# Altium PCB pcb.PcbDoc (part 2 of 9)
Units mil, origin at the board's own origin, x right, y up, seen from the top; angles counter-clockwise.
Board outline 3937.01 x 3937.01 mil, 4 copper layers (Top Layer, Ground plane, Power plane, Bottom Layer), stack 51.4 mil thick; 310 components, 276 nets, 1704 pads, 977 vias.
Unrouted connection lines stored in the file: 44.
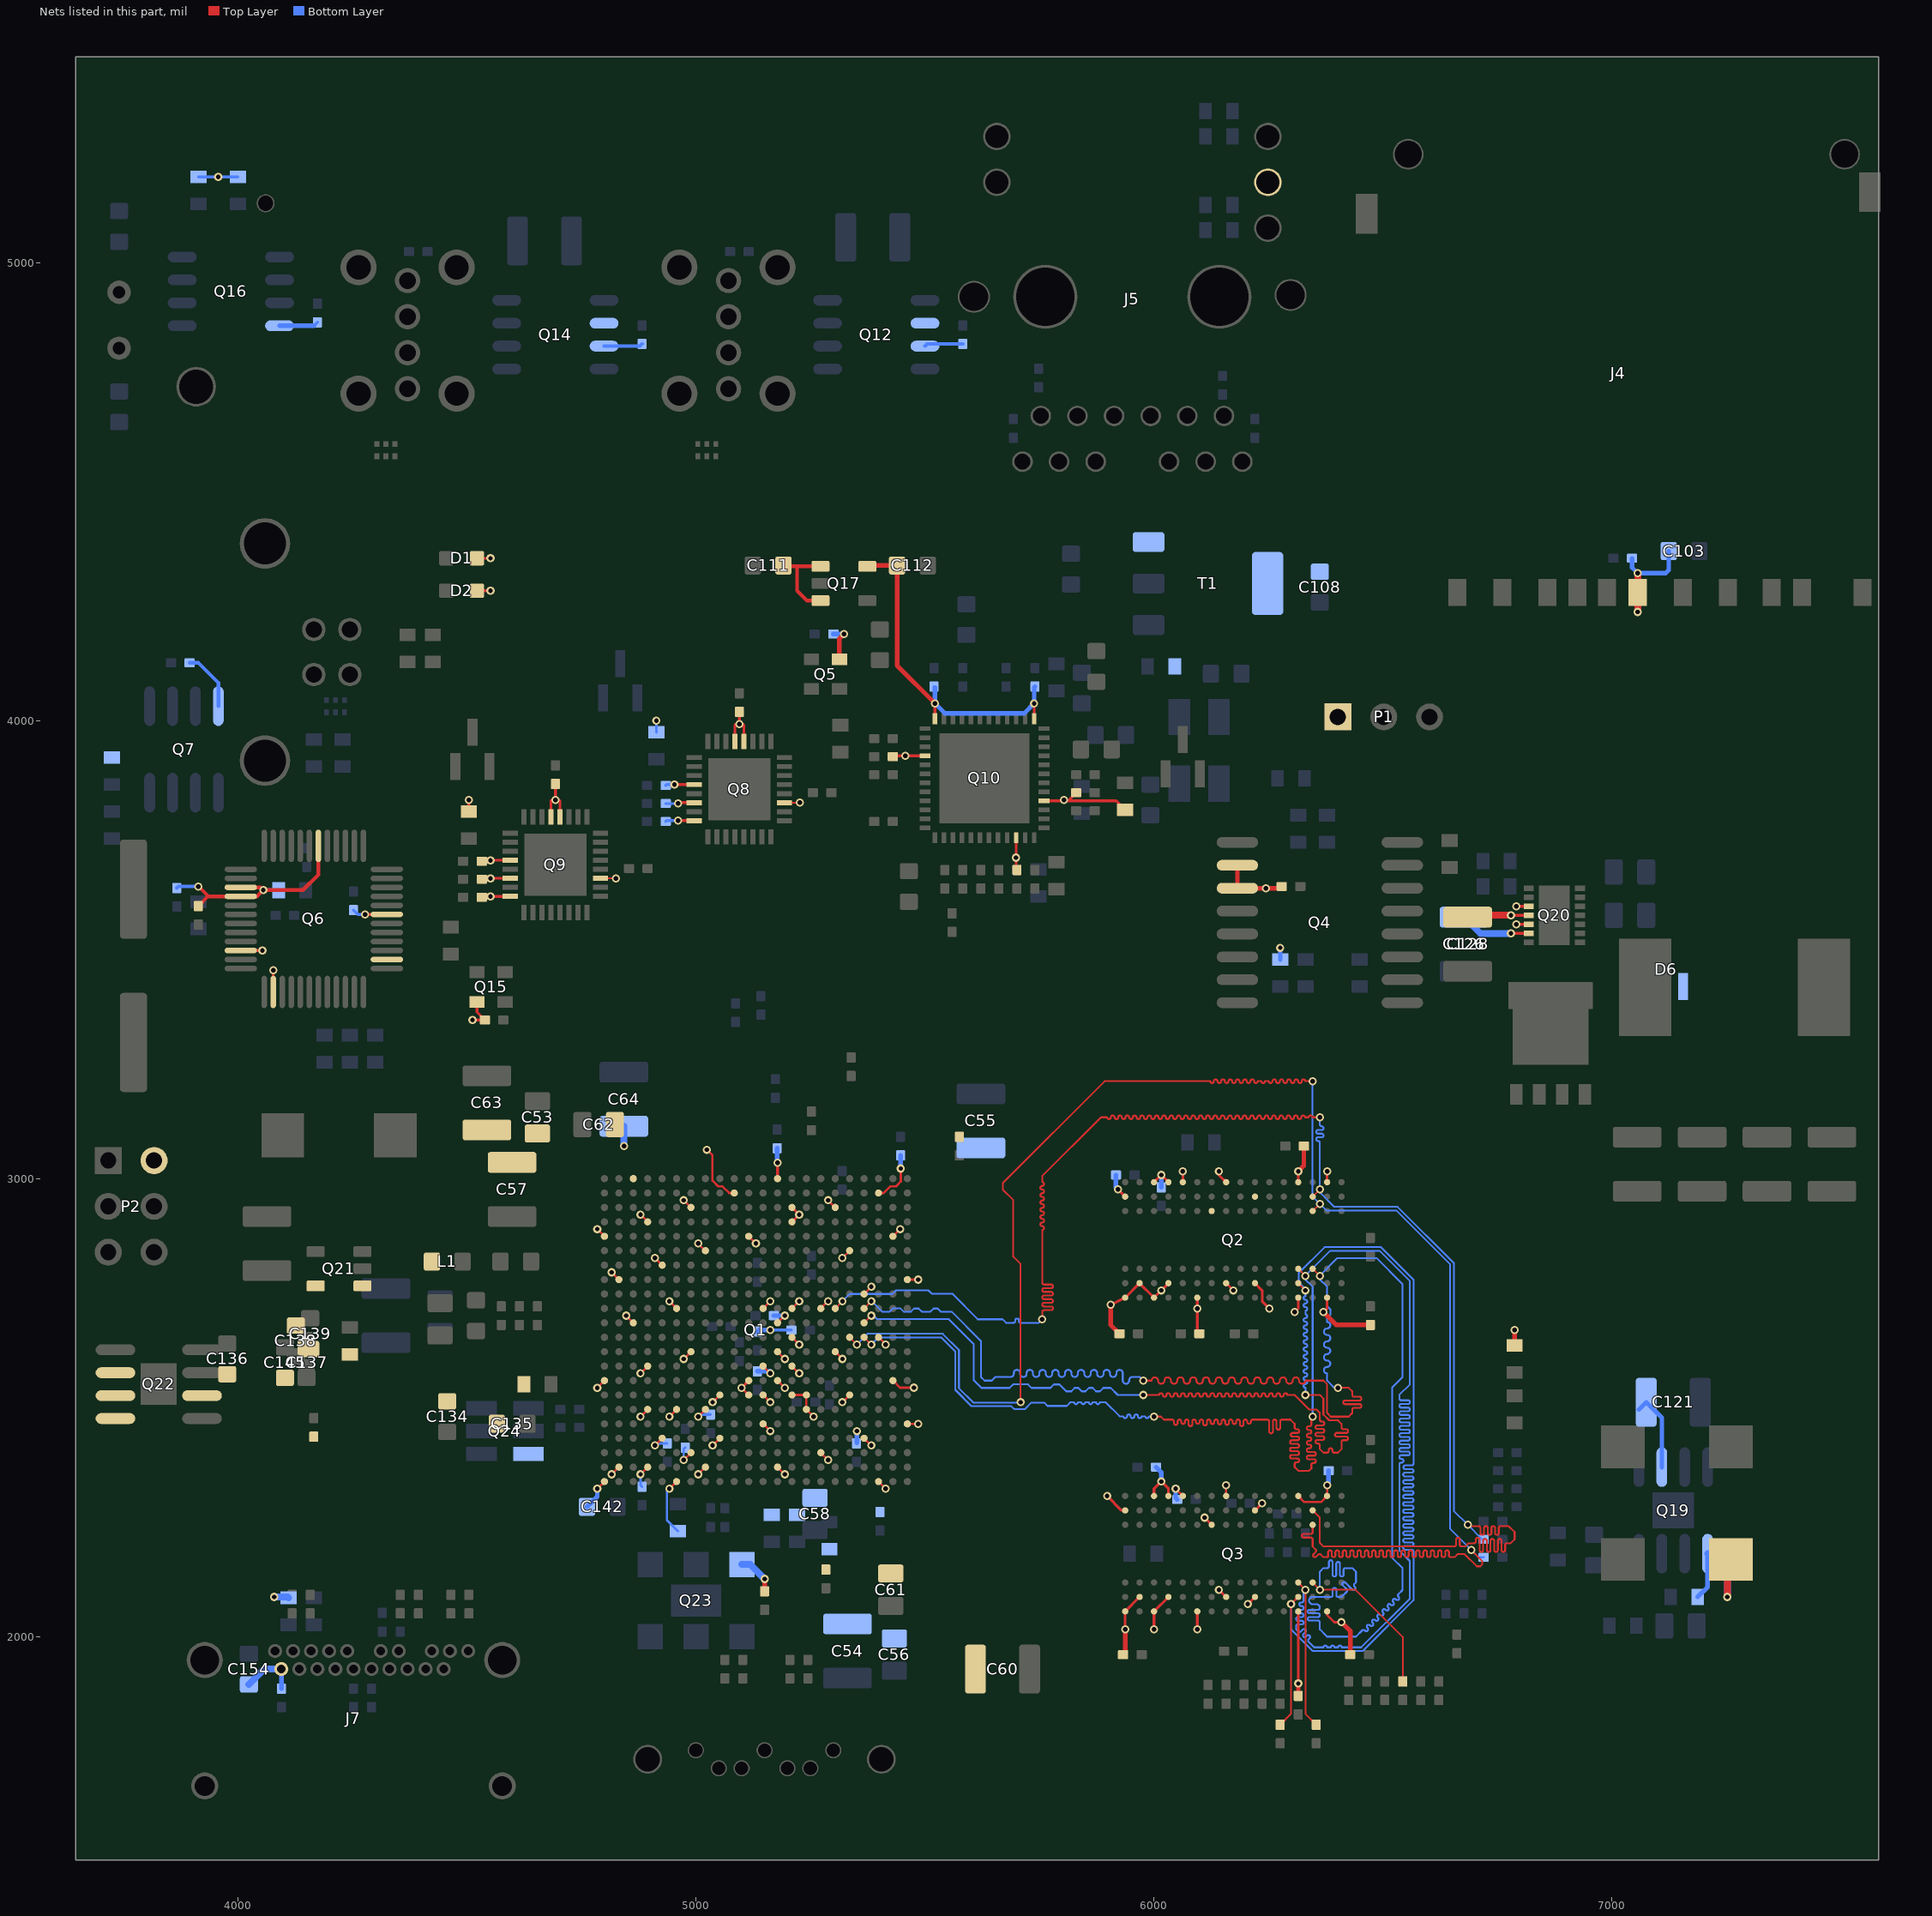
[diagram p3: the nets of this part, all layers, seen from the top]

## Via types
v1: diameter 18, hole 10, Top Layer to Bottom Layer, 932 vias
v2: diameter 19.68, hole 9.84, Top Layer to Bottom Layer, tented both sides, 18 vias
v3: diameter 19.68, hole 9.84, Top Layer to Bottom Layer, 16 vias
v4: diameter 19.68, hole 7.87, Top Layer to Bottom Layer, 11 vias

## Nets (pads, with @x,y where several pads share a name; then routed paths per layer and width w, separated by ;. In a path a pad name is that pad's centre, name@x,y a point inside that pad or via, vN(x,y) a via of type N, cw(c..) or ccw(c..) an arc to the next point about the centre after c; other vN are vias at no path point) (continued)
1V5: C1.2 C2.2 C3.2 C4.2 C5.2 C6.2 C11.2 C12.2 C13.2 C14.2 C15.2 C16.2 C40.2 C41.2 C42.2 C43.2 C60.2 C61.2 C119.1 Q1.E21 Q1.F18 Q1.H22 Q1.J19 Q1.K16 Q1.M20 Q1.N17 Q1.R21 Q1.V22 Q2.A1 Q2.A8 Q2.B2 Q2.C1 Q2.C9 Q2.D2 Q2.D9 Q2.E9 Q2.F1 Q2.G7 Q2.H2 Q2.H9 Q2.K2 Q2.K8 Q2.N1 Q2.N9 Q2.R1 Q2.R9 Q3.A1 Q3.A8 Q3.B2 Q3.C1 Q3.C9 Q3.D2 Q3.D9 Q3.E9 Q3.F1 Q3.G7 Q3.H2 Q3.H9 Q3.K2 Q3.K8 Q3.N1 Q3.N9 Q3.R1 Q3.R9 Q19.1 R2.1 R5.1 R84.2 | length 2580.7
  Top Layer w5: Q1.K16@5272.44,2716.54 v1(5288.19,2732.28) ; Q1.N17@5303.94,2622.05 v1(5319.69,2606.3) ; v1(5319.69,2826.77) Q1.F18@5335.43,2842.52 ; Q1.J19@5366.93,2748.03 v1(5382.68,2763.78) ; Q1.M20@5398.43,2653.54 v1(5414.17,2637.79) ; Q1.R21@5429.92,2559.05 5445.67,2543.31 5445.79,2543.43 v1(5475.66,2543.43) ; Q1.E21@5429.92,2874.02 v1(5445.67,2889.76) ; Q1.V22@5461.42,2464.57 v1(5485.04,2464.57) ; Q1.H22@5461.42,2779.53 v1(5485.04,2779.53) ; v1(6047.24,2322.83) Q3.E9@6062.99,2307.09 ; C4.2@6094.49,2665.94 C4.2@6099.02,2661.42 ; Q3.H9@6157.48,2307.09 6157.48,2322.83 v1(6157.48,2330.71) ; Q2.H2@6157.48,2771.65 v1(6173.23,2755.91) ; v1(6307.09,2708.66) 6314.96,2716.54 ; v1(6314.96,1897.64) Q3.N1@6314.96,2055.12 ; Q3.N9@6314.96,2307.09 6328.35,2293.7 6364.56,2293.7 Q3.R9@6377.95,2307.09 v1(6377.95,2330.71) ; Q2.N9@6314.96,2992.13 v1(6314.96,3015.75) ; Q3.R1@6377.95,2055.12 6377.95,2047.24 6393.7,2031.5 v1(6409.45,2031.5)
  Top Layer w6: v1(5897.64,2307.09) 5929.13,2275.59 Q3.A8@5937.01,2275.59 ; v1(5905.51,2724.41) Q2.A1@5937.01,2740.16 Q2.B2@5968.5,2771.65 Q2.C1@6000,2740.16 Q2.D2@6031.5,2771.65 ; v1(5921.26,2976.38) Q2.A8@5937.01,2960.63 ; v1(5937.01,2015.75) Q3.A1@5937.01,2055.12 Q3.B2@5968.5,2086.61 ; v1(6000,2015.75) Q3.C1@6000,2055.12 Q3.D2@6031.5,2086.61 ; Q3.C9@6000,2307.09 6000,2322.83 v1(6015.75,2338.58) 6031.5,2322.83 Q3.D9@6031.5,2307.09 ; Q2.C9@6000,2992.13 v1(6015.75,3007.87) Q2.D9@6031.5,2992.13 ; Q2.E9@6062.99,2992.13 v1(6062.99,3015.75) ; v1(6094.49,2015.75) Q3.F1@6094.49,2055.12 ; C4.2@6094.49,2665.94 v1(6094.49,2716.54) Q2.F1@6094.49,2740.16 ; v1(6110.24,2259.84) Q3.G7@6125.98,2244.09 ; v1(6141.73,2102.36) Q3.H2@6157.48,2086.61 ; v1(6141.73,3015.75) 6141.73,3007.87 Q2.H9@6157.48,2992.13 ; v1(6204.72,2070.87) Q3.K2@6220.47,2086.61 ; Q3.K8@6220.47,2275.59 v1(6236.22,2291.34) ; Q2.K2@6220.47,2771.65 6236.22,2755.91 6236.22,2732.28 v1(6251.97,2716.54) ; 6314.96,2716.54 Q2.N1@6314.96,2740.16 ; v1(6370.08,2708.66) 6377.95,2716.54 Q2.R1@6377.95,2740.16 ; Q2.R9@6377.95,2992.13 v1(6377.95,3015.75)
  Top Layer w10: v1(5905.51,2724.41) 5905.51,2680.51 C5.2@5924.61,2661.42 ; C16.2@5932.48,1960.63 5937.01,1965.16 v1(5937.01,2015.75) ; C14.2@6314.96,1870.67 v1(6314.96,1897.64) ; v1(6314.96,3015.75) 6327.36,3028.15 C3.2@6327.36,3070.87 ; v1(6370.08,2708.66) 6398.23,2680.51 C2.2@6472.44,2680.51 ; v1(6409.45,2031.5) 6428.54,2012.4 C15.2@6428.54,1960.63 ; R5.1@6787.4,2635.83 v1(6787.4,2669.29) ; C119.1@7251.97,2160.63 C119.1@7259.84,2168.5
  Top Layer w15: v1(7251.97,2086.61) C119.1@7251.97,2160.63
  Bottom Layer w5: v1@5916.73,2980.91 v1(5921.26,2976.38)
  Bottom Layer w6: v1(5162.2,2669.29) R2.1@5208.07,2669.29
  Bottom Layer w10: C41.2@5133.86,2665.94 5137.2,2669.29 v1(5162.2,2669.29) ; C43.2@5351.18,2422.64 v1(5351.18,2448.82) ; v1@5916.73,2980.91 C1.2@5916.73,3007.87 ; C13.2@6004.53,2370.08 6015.75,2358.86 v1(6015.75,2338.58) ; C6.2@6015.75,2980.91 v1(6015.75,3007.87) ; v1(6047.24,2322.83) 6047.24,2302.56 C11.2@6050.59,2299.21 ; v1(6377.95,2330.71) 6381.3,2334.06 C12.2@6381.3,2362.2 ; R84.2@7187.01,2086.61 7208.86,2108.46 Q19.1@7208.86,2181.1
  Bottom Layer w15: Q19.1@7208.86,2181.1 7251.97,2137.99 v1(7251.97,2086.61)
  other v1: 6015.75,2755.91
1V8: C35.2 C36.2 C37.2 C53.2 C54.2 C55.2 C56.2 C57.2 C58.2 C65.2 C68.2 C83.2 C84.2 C85.2 C86.2 C87.2 C88.2 C91.2 C92.2 C134.2 C138.2 L1.1 Q1.A13 Q1.B10 Q1.C14 Q1.D14 Q1.E11 Q1.K12 Q1.K14 Q1.L13 Q1.M14 Q1.N13 Q1.P12 Q1.P14 Q1.R13 Q1.T12 Q8.11 Q8.28 Q8.30 Q8.32 Q9.11 Q9.28 Q9.30 Q9.32 Q10.16 Q10.34 Q10.40 Q21.1 Q22.3 R69.1 R70.1 R80.1 R90.2 | length 1369.4
  Top Layer w4: Q9.11@4791.34,3655.51 v1(4824.8,3655.51) ; Q8.11@5192.91,3820.87 v1(5226.38,3820.87)
  Top Layer w5: v1(5023.62,3062.99) 5035.97,3050.64 5035.97,2995.67 5048.76,2982.88 5057.92,2982.88 5072.3,2968.5 Q1.B10@5083.46,2968.5 ; Q1.E11@5114.96,2874.02 v1(5130.71,2858.27) ; Q1.T12@5146.46,2527.56 v1(5162.21,2511.81) ; Q1.P12@5146.46,2590.55 v1(5162.21,2574.8) ; Q1.K12@5146.46,2716.54 v1(5162.21,2732.28) ; Q1.R13@5177.95,2559.05 v1(5193.7,2543.31) ; Q1.N13@5177.95,2622.05 v1(5193.7,2606.3) ; Q1.L13@5177.95,2685.04 v1(5193.7,2700.79) ; Q1.P14@5209.45,2590.55 v1(5225.2,2574.8) ; Q1.M14@5209.45,2653.54 v1(5225.2,2637.79) ; Q1.K14@5209.45,2716.54 v1(5225.2,2732.28)
  Top Layer w6: R70.1@4503.94,3801.18 v1(4503.94,3826.77) ; C84.2@4532.09,3692.91 4534.06,3694.88 Q9.28@4594.49,3694.88 ; C87.2@4534.06,3616.14 Q9.32@4594.49,3616.14 ; C88.2@4534.06,3655.51 Q9.30@4594.49,3655.51 ; v1(4952.76,3860.24) Q8.28@4996.06,3860.24 ; v1(4960.63,3781.5) Q8.32@4996.06,3781.5 ; v1(4960.63,3818.9) 4962.6,3820.87 Q8.30@4996.06,3820.87 ; Q1.A13@5177.95,3000 v1(5177.95,3034.65) ; Q1.D14@5209.45,2905.51 v1(5225.2,2921.26) Q1.C14@5209.45,2937.01 ; C68.2@5429.72,3921.26 5431.69,3923.23 v1(5456.69,3923.23) Q10.16@5500,3923.23 ; Q10.34@5698.82,3744.09 v1(5698.82,3700.79) 5698.82,3675.79 C91.2@5700.79,3673.82 ; Q10.40@5759.84,3824.8 v1@5801.18,3824.8 ; v1(5803.15,3826.77) v1@5801.18,3824.8 ; C92.2@5830.12,3842.52 5812.4,3824.8 ; R80.1@5937.01,3805.12 5917.32,3824.8 5812.4,3824.8 ; v1@5801.18,3824.8 5812.4,3824.8
  Bottom Layer w6: R69.1@4913.39,3974.41 v1(4913.39,4000) ; C83.2@4933.66,3779.53 4935.63,3781.5 v1(4960.63,3781.5) ; C86.2@4933.66,3818.9 v1(4960.63,3818.9) ; C85.2@4933.66,3858.27 4935.63,3860.24 v1(4952.76,3860.24)
  Bottom Layer w10: C37.2@5133.86,2579.33 5162.21,2579.33 v1(5162.21,2574.8) ; C35.2@5169.88,2700.79 v1(5193.7,2700.79) ; C65.2@5177.17,3066.34 5177.17,3034.65 v1(5177.95,3034.65)
  other v1: 4551.18,3616.14 4551.18,3655.51 4551.18,3694.88
3V3: C17.2 C20.2 C26.2 C39.2 C62.2 C63.2 C64.2 C81.2 C82.2 C101.2 C102.2 C103.2 C108.2 C114.2 C139.1 C153.2 C154.2 C163.2 C166.2 D1.A D2.A J4.4 J5.16 J7.20 P1.1 P2.2 Q1.A3 Q1.AA13 Q1.AB20 Q1.B20 Q1.C7 Q1.C17 Q1.D4 Q1.E1 Q1.F8 Q1.G5 Q1.H2 Q1.K6 Q1.L3 Q1.N7 Q1.P4 Q1.R1 Q1.R11 Q1.T9 Q1.T11 Q1.T14 Q1.T15 Q1.T18 Q1.U15 Q1.V12 Q1.W19 Q1.Y16 Q4.2 Q4.3 Q5.4 Q6.10 Q6.14 Q6.26 Q6.31 Q8.20 Q8.21 Q9.20 Q9.21 Q15.4 Q16.8 Q22.2 Q22.4 Q23.6 Q24.6 R34.2 R35.2 R36.2 R42.2 R81.2 R82.2 R83.2 R94.2 T1.3 T1.4 | length 2174.4
  Top Layer w5: v1(4784.25,2543.31) Q1.R1@4800,2559.05 ; v1(4784.25,2889.76) Q1.E1@4800,2874.02 ; v1(4815.75,2795.28) Q1.H2@4831.5,2779.53 ; v1(4847.24,2700.79) Q1.L3@4862.99,2685.04 ; v1(4878.74,2574.8) Q1.P4@4894.49,2590.55 ; v1(4878.74,2921.26) Q1.D4@4894.49,2905.51 ; v1(4910.24,2826.77) Q1.G5@4925.98,2811.02 ; v1(4941.73,2732.28) Q1.K6@4957.48,2716.54 ; v1(4973.23,2606.3) Q1.N7@4988.98,2622.05 ; v1(4973.23,2952.76) Q1.C7@4988.98,2937.01 ; v1(5004.72,2858.27) Q1.F8@5020.47,2842.52 ; v1(5036.22,2511.81) Q1.T9@5051.97,2527.56 ; v1(5099.21,2543.31) Q1.T11@5114.96,2527.56 ; Q1.V12@5146.46,2464.57 v1(5162.21,2448.82) ; Q1.AA13@5177.95,2370.08 v1(5193.7,2354.33) ; Q1.T14@5209.45,2527.56 Q1.T15@5240.95,2527.56 Q1.U15@5240.95,2496.06 v1(5256.69,2480.31) ; Q1.Y16@5272.44,2401.57 v1(5288.19,2385.83) ; v1(5288.19,2952.76) Q1.C17@5303.94,2937.01 ; Q1.W19@5366.93,2433.07 v1(5382.68,2417.32) ; Q1.AB20@5398.43,2338.58 v1(5414.17,2322.83) ; Q1.B20@5398.43,2968.5 5409.59,2968.5 5423.97,2982.88 5436.42,2982.88 5447.04,2993.5 v1(5447.04,3021.85)
  Top Layer w5.12: v1(5319.69,2511.81) Q1.T18@5335.43,2527.56
  Top Layer w6: Q6.10@4005.91,3498.03 v1(4053.15,3498.03) ; Q6.14@4076.77,3407.48 v1(4076.77,3454.72) ; v1(4277.56,3576.77) Q6.31@4324.8,3576.77 ; v1(4511.81,3346.46) C101.2@4538.78,3346.46 4521.65,3363.58 Q15.4@4521.65,3385.83 ; D2.A@4521.65,4283.46 v1(4551.18,4283.46) ; D1.A@4521.65,4354.33 v1(4551.18,4354.33) ; Q9.21@4683.07,3789.37 4683.07,3824.8 4685.04,3826.77 v1(4692.91,3826.77) ; C82.2@4692.91,3861.61 v1(4692.91,3826.77) ; Q9.20@4702.76,3789.37 4702.76,3824.8 4700.79,3826.77 v1(4692.91,3826.77) ; Q8.21@5084.65,3954.72 5084.65,3990.16 5086.61,3992.13 v1(5094.49,3992.13) ; C81.2@5094.49,4019.09 v1(5094.49,3992.13) ; v1(5099.21,2543.31) Q1.R11@5114.96,2559.05 ; Q8.20@5104.33,3954.72 5104.33,3990.16 5102.36,3992.13 v1(5094.49,3992.13)
  Top Layer w10: C163.2@5149.61,2099.02 v1(5149.61,2125.98) ; Q5.4@5312.99,4133.86 5312.99,4179.13 v1(5322.83,4188.98) ; Q4.2@6182.09,3684.06 Q4.3@6182.09,3634.06 v1(6244.09,3634.06) 6275.2,3634.06 C17.2@6278.94,3637.8
  Top Layer w15: v1(7056.1,4237.2) J4.4@7056.1,4279.53 v1(7056.1,4321.85)
  Bottom Layer w6: R83.2@3913.39,5187.01 v1(3956.69,5187.01) R82.2@4000,5187.01 ; C114.2@4165.75,4862.01 C114.2@4173.23,4869.49 ; C20.2@4251.97,3586.02 4261.22,3576.77 v1(4277.56,3576.77)
  Bottom Layer w10: Q16.8@4090.55,4862.01 C114.2@4165.75,4862.01 ; C153.2@4094.49,1886.42 J7.20@4094.49,1929.13 ; C26.2@5299.8,4188.98 v1(5322.83,4188.98) ; v1@5446.85,3021.85 C39.2@5446.85,3050.59 ; R36.2@6275.59,3478.35 v1(6275.59,3503.94) ; C102.2@7043.9,4354.33 7043.9,4334.06 v1(7056.1,4321.85) 7117.13,4321.85 7124.02,4328.74 C103.2@7124.02,4370.08
  Bottom Layer w15: C154.2@4023.62,1895.67 4057.09,1929.13 J7.20@4094.49,1929.13 ; v1(4078.74,2086.61) 4108.27,2086.61 R94.2@4110.24,2084.65 ; v1(4842.52,3070.87) C64.2@4842.52,3114.17 ; Q23.6@5100,2157.48 5118.11,2157.48 v1(5149.61,2125.98)
5V: C18.2 C19.2 C25.1 C99.2 C100.2 C111.2 C121.2 C126.2 C128.2 D6.1 Q6.3 Q6.4 Q6.42 Q7.8 Q12.2 Q12.3 Q14.2 Q14.3 Q17.1 Q17.3 Q19.6 Q20.3 Q20.4 Q20.5 Q20.6 R43.2 R53.1 | length 1540.2
  Top Layer w6: v1(6779.53,3535.43) Q20.6@6817.91,3535.43 ; v1(6779.53,3574.8) Q20.4@6817.91,3574.8 ; v1(6791.34,3555.12) Q20.5@6817.91,3555.12 ; v1(6791.34,3594.49) Q20.3@6817.91,3594.49
  Top Layer w8: C19.2@3913.39,3595.08 3934.45,3616.14 3935.04,3616.14 ; v1(3913.39,3637.8) 3935.04,3616.14 ; Q6.3@4005.91,3635.83 4049.21,3635.83 v1(4055.12,3629.92) ; Q6.42@4175.2,3726.38 4175.2,3663.39 4141.73,3629.92 v1(4055.12,3629.92) ; C111.2@5190.94,4338.58 5192.91,4336.61 5220.47,4336.61 ; Q17.3@5271.65,4261.81 5242.13,4261.81 5220.47,4283.46 5220.47,4336.61 ; Q17.1@5271.65,4336.61 5220.47,4336.61 ; 3935.04,3616.14 Q6.4@4005.91,3616.14 4041.34,3616.14 v1(4055.12,3629.92)
  Top Layer w15: C128.2@6685.04,3570.87 6688.98,3574.8 v1(6779.53,3574.8)
  Bottom Layer w8: C18.2@3866.14,3634.45 3869.49,3637.8 v1(3913.39,3637.8) ; C25.1@3894.29,4125.98 3913.39,4125.98 3956.89,4082.48 Q7.8@3956.89,4031.5 ; v1(4055.12,3629.92) R43.2@4088.58,3629.92 ; Q14.3@4799.21,4817.52 4877.17,4817.52 C100.2@4881.89,4822.24 ; Q12.3@5500,4817.52 5504.72,4822.24 C99.2@5582.68,4822.24
  Bottom Layer w10: C121.2@7058.86,2495.87 C121.2@7074.8,2511.81 7108.86,2477.76 Q19.6@7108.86,2370.08
  Bottom Layer w15: C126.2@6681.1,3574.8 C126.2@6677.17,3570.87 6712.6,3535.43 v1(6779.53,3535.43)
A0: Q1.M19 Q2.N3 Q3.N3 R7.1 | length 4398.8
  Top Layer w4: Q1.M19@5366.93,2653.54 v1(5382.68,2637.79) ; v1(6000,2480.32) 6015.22,2480.32 6021.68,2473.86 6039.5,2473.86 cw(c6039.5,2469.86) 6043.5,2469.86 6043.5,2466.43 ccw(c6047.5,2466.43) 6047.5,2462.43 ccw(c6047.5,2466.43) 6051.5,2466.43 6051.5,2469.86 cw(c6055.5,2469.86) 6055.5,2473.86 cw(c6055.5,2469.86) 6059.5,2469.86 6059.5,2468.45 ccw(c6063.5,2468.45) 6063.5,2464.45 ccw(c6063.5,2468.45) 6067.5,2468.45 6067.5,2469.86 cw(c6071.5,2469.86) 6071.5,2473.86 cw(c6071.5,2469.86) 6075.5,2469.86 6075.5,2463.55 ccw(c6079.5,2463.55) 6079.5,2459.55 ccw(c6079.5,2463.55) 6083.5,2463.55 6083.5,2469.86 cw(c6087.5,2469.86) 6087.5,2473.86 cw(c6087.5,2469.86) 6091.5,2469.86 6091.5,2468.66 ccw(c6095.5,2468.66) 6095.5,2464.66 ccw(c6095.5,2468.66) 6099.5,2468.66 6099.5,2469.86 cw(c6103.5,2469.86) 6103.5,2473.86 cw(c6103.5,2469.86) 6107.5,2469.86 6107.5,2465.18 ccw(c6111.5,2465.18) 6111.5,2461.18 ccw(c6111.5,2465.18) 6115.5,2465.18 6115.5,2469.86 cw(c6119.5,2469.86) 6119.5,2473.86 cw(c6119.5,2469.86) 6123.5,2469.86 6123.5,2468.02 ccw(c6127.5,2468.02) 6127.5,2464.02 ccw(c6127.5,2468.02) 6131.5,2468.02 6131.5,2469.86 cw(c6135.5,2469.86) 6135.5,2473.86 cw(c6135.5,2469.86) 6139.5,2469.86 6139.5,2467.35 ccw(c6143.5,2467.35) 6143.5,2463.35 ccw(c6143.5,2467.35) 6147.5,2467.35 6147.5,2469.86 cw(c6151.5,2469.86) 6151.5,2473.86 cw(c6151.5,2469.86) 6155.5,2469.86 6155.5,2466.43 ccw(c6159.5,2466.43) 6159.5,2462.43 ccw(c6159.5,2466.43) 6163.5,2466.43 6163.5,2469.86 cw(c6167.5,2469.86) 6167.5,2473.86 cw(c6167.5,2469.86) 6171.5,2469.86 6171.5,2468.45 ccw(c6175.5,2468.45) 6175.5,2464.45 ccw(c6175.5,2468.45) 6179.5,2468.45 6179.5,2469.86 cw(c6183.5,2469.86) 6183.5,2473.86 cw(c6183.5,2469.86) 6187.5,2469.86 6187.5,2463.55 ccw(c6191.5,2463.55) 6191.5,2459.55 ccw(c6191.5,2463.55) 6195.5,2463.55 6195.5,2469.86 cw(c6199.5,2469.86) 6199.5,2473.86 cw(c6199.5,2469.86) 6203.5,2469.86 6203.5,2468.69 ccw(c6207.5,2468.69) 6207.5,2464.69 ccw(c6207.5,2468.69) 6211.5,2468.69 6211.5,2469.86 cw(c6215.5,2469.86) 6215.5,2473.86 6247.5,2473.86 cw(c6247.5,2469.86) 6251.5,2469.86 6251.5,2447.86 ccw(c6255.5,2447.86) 6255.5,2443.86 ccw(c6255.5,2447.86) 6259.5,2447.86 6259.5,2469.86 cw(c6263.5,2469.86) 6263.5,2473.86 cw(c6263.5,2469.86) 6267.5,2469.86 6267.5,2455.7 ccw(c6271.5,2455.7) 6271.5,2451.7 ccw(c6271.5,2455.7) 6275.5,2455.7 6275.5,2469.86 cw(c6279.5,2469.86) 6279.5,2473.86 6297.8,2473.86 6307.09,2464.57 6307.09,2456.69 ccw(c6311.09,2456.69) 6311.09,2452.69 6313.09,2452.69 cw(c6313.09,2448.69) 6317.09,2448.69 cw(c6313.09,2448.69) 6313.09,2444.69 6302.46,2444.69 ccw(c6302.46,2440.69) 6298.46,2440.69 ccw(c6302.46,2440.69) 6302.46,2436.69 6313.09,2436.69 cw(c6313.09,2432.69) 6317.09,2432.69 cw(c6313.09,2432.69) 6313.09,2428.69 6301.09,2428.69 ccw(c6301.09,2424.69) 6297.09,2424.69 ccw(c6301.09,2424.69) 6301.09,2420.69 6313.09,2420.69 cw(c6313.09,2416.69) 6317.09,2416.69 cw(c6313.09,2416.69) 6313.09,2412.69 6301.09,2412.69 ccw(c6301.09,2408.69) 6297.09,2408.69 ccw(c6301.09,2408.69) 6301.09,2404.69 6313.09,2404.69 cw(c6313.09,2400.69) 6317.09,2400.69 cw(c6313.09,2400.69) 6313.09,2396.69 6301.09,2396.69 ccw(c6301.09,2392.69) 6297.09,2392.69 ccw(c6301.09,2392.69) 6301.09,2388.69 6313.09,2388.69 cw(c6313.09,2384.69) 6317.09,2384.69 cw(c6313.09,2384.69) 6313.09,2380.69 6311.09,2380.69 ccw(c6311.09,2376.69) 6307.09,2376.69 6307.09,2369.45 6307.72,2369.45 6314.96,2362.2 6338.58,2362.2 6343.52,2367.15 6343.52,2375.15 cw(c6347.52,2375.15) 6347.52,2379.15 6349.52,2379.15 ccw(c6349.52,2383.15) 6353.52,2383.15 ccw(c6349.52,2383.15) 6349.52,2387.15 6337.52,2387.15 cw(c6337.52,2391.15) 6333.52,2391.15 cw(c6337.52,2391.15) 6337.52,2395.15 6349.52,2395.15 ccw(c6349.52,2399.15) 6353.52,2399.15 ccw(c6349.52,2399.15) 6349.52,2403.15 6337.52,2403.15 cw(c6337.52,2407.15) 6333.52,2407.15 cw(c6337.52,2407.15) 6337.52,2411.15 6339.52,2411.15 ccw(c6339.52,2415.15) 6343.52,2415.15 ccw(c6339.52,2415.15) 6339.52,2419.15 6337.52,2419.15 cw(c6337.52,2423.15) 6333.52,2423.15 cw(c6337.52,2423.15) 6337.52,2427.15 6339.52,2427.15 ccw(c6339.52,2431.15) 6343.52,2431.15 ccw(c6339.52,2431.15) 6339.52,2435.15 6337.52,2435.15 cw(c6337.52,2439.15) 6333.52,2439.15 cw(c6337.52,2439.15) 6337.52,2443.15 6339.52,2443.15 ccw(c6339.52,2447.15) 6343.52,2447.15 ccw(c6339.52,2447.15) 6339.52,2451.15 6337.52,2451.15 cw(c6337.52,2455.15) 6333.52,2455.15 cw(c6337.52,2455.15) 6337.52,2459.15 6339.52,2459.15 ccw(c6339.52,2463.15) 6343.52,2463.15 6343.52,2477.38 v1(6346.46,2480.32) ; Q3.N3@6314.96,2118.11 v1(6330.71,2102.36) 6330.71,1913.39 6330.8,1913.29 6330.8,1831.2 R7.1@6354.33,1807.68 ; Q2.N3@6314.96,2803.15 v1(6330.71,2787.4)
  Bottom Layer w4: v1(5382.68,2637.79) 5398.05,2653.17 5535.36,2653.17 5566.05,2622.47 5566.05,2538.76 5601.75,2503.06 5688.33,2503.06 5694.58,2496.8 5717.91,2496.8 5732.16,2511.06 5760.06,2511.06 5767.44,2503.68 5809.78,2503.68 5817.65,2511.56 5825.65,2511.56 ccw(c5829.65,2511.56) 5833.65,2511.56 5841.65,2511.56 ccw(c5845.65,2511.56) 5849.65,2511.56 5857.65,2511.56 ccw(c5861.65,2511.56) 5865.65,2511.56 5873.65,2511.56 ccw(c5877.65,2511.56) 5881.65,2511.56 5894.49,2511.56 5924.98,2481.06 5932.98,2481.06 ccw(c5936.98,2481.06) 5940.98,2481.06 cw(c5944.98,2481.06) 5948.98,2481.06 ccw(c5952.98,2481.06) 5956.98,2481.06 cw(c5960.98,2481.06) 5964.98,2481.06 ccw(c5968.98,2481.06) 5972.98,2481.06 5980.98,2481.06 ccw(c5984.98,2481.06) 5988.98,2481.06 5999.25,2481.06 v1(6000,2480.32) ; v1(6330.71,2102.36) 6326.73,2098.38 6326.73,2078.61 cw(c6322.73,2078.61) 6322.73,2074.61 6321.4,2074.61 ccw(c6321.4,2070.61) 6317.4,2070.61 ccw(c6321.4,2070.61) 6321.4,2066.61 6322.73,2066.61 cw(c6322.73,2062.61) 6326.73,2062.61 cw(c6322.73,2062.61) 6322.73,2058.61 6314.4,2058.61 ccw(c6314.4,2054.61) 6310.4,2054.61 ccw(c6314.4,2054.61) 6314.4,2050.61 6322.73,2050.61 cw(c6322.73,2046.61) 6326.73,2046.61 cw(c6322.73,2046.61) 6322.73,2042.61 6314.4,2042.61 ccw(c6314.4,2038.61) 6310.4,2038.61 ccw(c6314.4,2038.61) 6314.4,2034.61 6322.73,2034.61 cw(c6322.73,2030.61) 6326.73,2030.61 cw(c6322.73,2030.61) 6322.73,2026.61 6314.4,2026.61 ccw(c6314.4,2022.61) 6310.4,2022.61 6310.4,2015.88 6314.96,2011.31 ccw(c6317.79,2014.14) 6320.62,2011.31 6324.87,2015.57 cw(c6327.7,2012.74) 6330.53,2015.57 cw(c6327.7,2012.74) 6330.53,2009.91 6326.27,2005.66 ccw(c6329.1,2002.83) 6326.27,2000 ccw(c6329.1,2002.83) 6331.93,2000 6334.08,2002.15 cw(c6336.91,1999.32) 6339.74,2002.15 cw(c6336.91,1999.32) 6339.74,1996.49 6337.59,1994.34 ccw(c6340.42,1991.51) 6337.59,1988.69 6349.77,1976.5 6370.08,1976.5 cw(c6374.08,1976.5) 6378.08,1976.5 6386.08,1976.5 cw(c6390.08,1976.5) 6394.08,1976.5 6402.08,1976.5 cw(c6406.08,1976.5) 6410.08,1976.5 6452.38,1976.5 6558.69,2082.8 6558.69,2165.35 6558.47,2165.35 6535.81,2188.02 6535.81,2188.12 ; 6345.63,2542.48 6346.46,2543.31 ; v1(6346.46,2480.32) 6346.46,2543.31 ; 6535.81,2188.23 6535.81,2375.94 cw(c6539.81,2375.94) 6539.81,2379.94 6540.83,2379.94 ccw(c6540.83,2383.94) 6544.83,2383.94 ccw(c6540.83,2383.94) 6540.83,2387.94 6539.81,2387.94 cw(c6539.81,2391.94) 6535.81,2391.94 cw(c6539.81,2391.94) 6539.81,2395.94 6554.69,2395.94 ccw(c6554.69,2399.94) 6558.69,2399.94 ccw(c6554.69,2399.94) 6554.69,2403.94 6539.81,2403.94 cw(c6539.81,2407.94) 6535.81,2407.94 cw(c6539.81,2407.94) 6539.81,2411.94 6554.69,2411.94 ccw(c6554.69,2415.94) 6558.69,2415.94 ccw(c6554.69,2415.94) 6554.69,2419.94 6539.81,2419.94 cw(c6539.81,2423.94) 6535.81,2423.94 cw(c6539.81,2423.94) 6539.81,2427.94 6554.69,2427.94 ccw(c6554.69,2431.94) 6558.69,2431.94 ccw(c6554.69,2431.94) 6554.69,2435.94 6539.81,2435.94 cw(c6539.81,2439.94) 6535.81,2439.94 cw(c6539.81,2439.94) 6539.81,2443.94 6554.69,2443.94 ccw(c6554.69,2447.94) 6558.69,2447.94 ccw(c6554.69,2447.94) 6554.69,2451.94 6539.81,2451.94 cw(c6539.81,2455.94) 6535.81,2455.94 cw(c6539.81,2455.94) 6539.81,2459.94 6554.69,2459.94 ccw(c6554.69,2463.94) 6558.69,2463.94 ccw(c6554.69,2463.94) 6554.69,2467.94 6539.81,2467.94 cw(c6539.81,2471.94) 6535.81,2471.94 cw(c6539.81,2471.94) 6539.81,2475.94 6554.69,2475.94 ccw(c6554.69,2479.94) 6558.69,2479.94 ccw(c6554.69,2479.94) 6554.69,2483.94 6539.81,2483.94 cw(c6539.81,2487.94) 6535.81,2487.94 cw(c6539.81,2487.94) 6539.81,2491.94 6554.69,2491.94 ccw(c6554.69,2495.94) 6558.69,2495.94 ccw(c6554.69,2495.94) 6554.69,2499.94 6539.81,2499.94 cw(c6539.81,2503.94) 6535.81,2503.94 cw(c6539.81,2503.94) 6539.81,2507.94 6554.69,2507.94 ccw(c6554.69,2511.94) 6558.69,2511.94 ccw(c6554.69,2511.94) 6554.69,2515.94 6539.81,2515.94 cw(c6539.81,2519.94) 6535.81,2519.94 6535.81,2527.94 6558.69,2550.81 6558.69,2776.04 6492.32,2842.4 6384.68,2842.4 6330.71,2788.43 v1(6330.71,2787.4) 6330.71,2779.53 6346.46,2763.78 6346.46,2543.31
A1: Q1.M18 Q2.P7 Q3.P7 R8.1 | length 4128
  Top Layer w4: Q1.M18@5335.43,2653.54 v1(5351.18,2637.79) ; v1(5708.67,2511.8) 5708.66,2813.43 5692.79,2829.31 5692.79,2952.88 5670.04,2975.63 5670.04,2990.47 5892.17,3212.6 6122.58,3212.6 ccw(c6126.58,3212.6) 6130.58,3212.6 cw(c6134.58,3212.6) 6138.58,3212.6 ccw(c6142.58,3212.6) 6146.58,3212.6 cw(c6150.58,3212.6) 6154.58,3212.6 ccw(c6158.58,3212.6) 6162.58,3212.6 cw(c6166.58,3212.6) 6170.58,3212.6 ccw(c6174.58,3212.6) 6178.58,3212.6 cw(c6182.58,3212.6) 6186.58,3212.6 ccw(c6190.58,3212.6) 6194.58,3212.6 cw(c6198.58,3212.6) 6202.58,3212.6 ccw(c6206.58,3212.6) 6210.58,3212.6 cw(c6214.58,3212.6) 6218.58,3212.6 ccw(c6222.58,3212.6) 6226.58,3212.6 6234.58,3212.6 ccw(c6238.58,3212.6) 6242.58,3212.6 6250.58,3212.6 ccw(c6254.58,3212.6) 6258.58,3212.6 cw(c6262.58,3212.6) 6266.58,3212.6 ccw(c6270.58,3212.6) 6274.58,3212.6 cw(c6278.58,3212.6) 6282.58,3212.6 ccw(c6286.58,3212.6) 6290.58,3212.6 cw(c6294.58,3212.6) 6298.58,3212.6 ccw(c6302.58,3212.6) 6306.58,3212.6 cw(c6310.58,3212.6) 6314.58,3212.6 ccw(c6318.58,3212.6) 6322.58,3212.6 cw(c6326.58,3212.6) 6330.58,3212.6 v1(6346.46,3212.6) ; Q3.P7@6346.46,2244.09 6346.46,2228.22 cw(c6342.46,2228.22) 6342.46,2224.22 6326.96,2224.22 ccw(c6326.96,2220.22) 6322.96,2220.22 ccw(c6326.96,2220.22) 6326.96,2216.22 6342.46,2216.22 cw(c6342.46,2212.22) 6346.46,2212.22 6346.46,2196.85 6352.98,2190.32 cw(c6350.15,2187.5) 6352.98,2184.67 6348.5,2180.18 ccw(c6351.32,2177.35) 6348.5,2174.52 ccw(c6351.32,2177.35) 6354.15,2174.52 6358.64,2179.01 cw(c6361.47,2176.18) 6364.3,2179.01 6369.95,2173.35 6377.95,2173.35 ccw(c6377.95,2175.48) 6380.08,2175.48 6380.08,2184.42 cw(c6384.08,2184.42) 6384.08,2188.42 cw(c6384.08,2184.42) 6388.08,2184.42 6388.08,2177.35 ccw(c6392.08,2177.35) 6392.08,2173.35 ccw(c6392.08,2177.35) 6396.08,2177.35 6396.08,2184.42 cw(c6400.08,2184.42) 6400.08,2188.42 cw(c6400.08,2184.42) 6404.08,2184.42 6404.08,2177.35 ccw(c6408.08,2177.35) 6408.08,2173.35 ccw(c6408.08,2177.35) 6412.08,2177.35 6412.08,2184.42 cw(c6416.08,2184.42) 6416.08,2188.42 cw(c6416.08,2184.42) 6420.08,2184.42 6420.08,2177.35 ccw(c6424.08,2177.35) 6424.08,2173.35 ccw(c6424.08,2177.35) 6428.08,2177.35 6428.08,2184.42 cw(c6432.08,2184.42) 6432.08,2188.42 cw(c6432.08,2184.42) 6436.08,2184.42 6436.08,2177.35 ccw(c6440.08,2177.35) 6440.08,2173.35 ccw(c6440.08,2177.35) 6444.08,2177.35 6444.08,2184.42 cw(c6448.08,2184.42) 6448.08,2188.42 cw(c6448.08,2184.42) 6452.08,2184.42 6452.08,2177.35 ccw(c6456.08,2177.35) 6456.08,2173.35 ccw(c6456.08,2177.35) 6460.08,2177.35 6460.08,2184.42 cw(c6464.08,2184.42) 6464.08,2188.42 cw(c6464.08,2184.42) 6468.08,2184.42 6468.08,2177.35 ccw(c6472.08,2177.35) 6472.08,2173.35 ccw(c6472.08,2177.35) 6476.08,2177.35 6476.08,2184.42 cw(c6480.08,2184.42) 6480.08,2188.42 cw(c6480.08,2184.42) 6484.08,2184.42 6484.08,2177.35 ccw(c6488.08,2177.35) 6488.08,2173.35 ccw(c6488.08,2177.35) 6492.08,2177.35 6492.08,2184.42 cw(c6496.08,2184.42) 6496.08,2188.42 cw(c6496.08,2184.42) 6500.08,2184.42 6500.08,2177.35 ccw(c6504.08,2177.35) 6504.08,2173.35 ccw(c6504.08,2177.35) 6508.08,2177.35 6508.08,2184.42 cw(c6512.08,2184.42) 6512.08,2188.42 cw(c6512.08,2184.42) 6516.08,2184.42 6516.08,2177.35 ccw(c6520.08,2177.35) 6520.08,2173.35 ccw(c6520.08,2177.35) 6524.08,2177.35 6524.08,2184.42 cw(c6528.08,2184.42) 6528.08,2188.42 cw(c6528.08,2184.42) 6532.08,2184.42 6532.08,2177.35 ccw(c6536.08,2177.35) 6536.08,2173.35 ccw(c6536.08,2177.35) 6540.08,2177.35 6540.08,2184.42 cw(c6544.08,2184.42) 6544.08,2188.42 cw(c6544.08,2184.42) 6548.08,2184.42 6548.08,2177.35 ccw(c6552.08,2177.35) 6552.08,2173.35 ccw(c6552.08,2177.35) 6556.08,2177.35 6556.08,2184.42 cw(c6560.08,2184.42) 6560.08,2188.42 cw(c6560.08,2184.42) 6564.08,2184.42 6564.08,2177.35 ccw(c6568.08,2177.35) 6568.08,2173.35 ccw(c6568.08,2177.35) 6572.08,2177.35 6572.08,2184.42 cw(c6576.08,2184.42) 6576.08,2188.42 cw(c6576.08,2184.42) 6580.08,2184.42 6580.08,2177.35 ccw(c6584.08,2177.35) 6584.08,2173.35 ccw(c6584.08,2177.35) 6588.08,2177.35 6588.08,2184.42 cw(c6592.08,2184.42) 6592.08,2188.42 cw(c6592.08,2184.42) 6596.08,2184.42 6596.08,2177.35 ccw(c6600.08,2177.35) 6600.08,2173.35 ccw(c6600.08,2177.35) 6604.08,2177.35 6604.08,2184.42 cw(c6608.08,2184.42) 6608.08,2188.42 cw(c6608.08,2184.42) 6612.08,2184.42 6612.08,2177.35 ccw(c6616.08,2177.35) 6616.08,2173.35 ccw(c6616.08,2177.35) 6620.08,2177.35 6620.08,2184.42 cw(c6624.08,2184.42) 6624.08,2188.42 cw(c6624.08,2184.42) 6628.08,2184.42 6628.08,2177.35 ccw(c6632.08,2177.35) 6632.08,2173.35 ccw(c6632.08,2177.35) 6636.08,2177.35 6636.08,2184.42 cw(c6640.08,2184.42) 6640.08,2188.42 cw(c6640.08,2184.42) 6644.08,2184.42 6644.08,2177.35 ccw(c6648.08,2177.35) 6648.08,2173.35 6656.08,2173.35 6663.08,2180.35 6677.91,2180.35 6704.72,2153.54 6712.6,2153.54 6716.54,2157.48 6716.54,2165.35 v1(6692.91,2188.98) ; Q2.P7@6346.46,2929.13 v1(6362.2,2944.88)
  Bottom Layer w4: v1(5351.18,2637.79) 5351.31,2637.79 5374.68,2661.17 5538.67,2661.17 5574.05,2625.79 5574.05,2542.36 5605.35,2511.06 5707.92,2511.06 v1(5708.67,2511.8) ; v1@6345.71,3212.6 6345.71,2961.38 v1(6362.2,2944.88) 6376.69,2930.4 6528.77,2930.4 6646.69,2812.49 6646.69,2235.2 v1(6692.91,2188.98) 6708.66,2173.23 R8.1@6719.88,2173.23
A1V0: C136.1 C137.2 C143.2 C144.2 C145.1 Q1.U4 Q1.U6 Q1.U8 Q1.W5 Q1.W9 Q22.6 R91.1 | length 168.6
  Top Layer w5: v1(4878.74,2480.31) Q1.U4@4894.49,2496.06 ; v1(4910.24,2417.32) Q1.W5@4925.98,2433.07 ; v1(4941.73,2480.31) Q1.U6@4957.48,2496.06 ; v1(5004.72,2480.31) Q1.U8@5020.47,2496.06 ; v1(5036.22,2417.32) Q1.W9@5051.97,2433.07
  Bottom Layer w6: v1(4910.24,2417.32) 4914.76,2421.85 C143.2@4937.01,2421.85 ; v1(5004.72,2480.31) 5009.25,2484.84 C144.2@5031.5,2484.84
A1V2: C135.2 C140.2 C141.2 C142.1 Q1.AA2 Q1.AA4 Q1.AA8 Q1.AB1 Q1.AB6 Q1.Y7 Q21.5 R89.2 | length 343.6
  Top Layer w5: v1(4784.25,2322.83) Q1.AB1@4800,2338.58 ; v1(4815.75,2354.33) Q1.AA2@4831.5,2370.08 ; v1(4878.74,2354.33) Q1.AA4@4894.49,2370.08 ; v1(4941.73,2322.83) Q1.AB6@4957.48,2338.58 ; v1(4973.23,2385.83) Q1.Y7@4988.98,2401.57 ; v1(5004.72,2354.33) Q1.AA8@5020.47,2370.08
  Bottom Layer w5: v1(4878.74,2354.33) 4878.74,2330.51 C141.2@4881.89,2327.36 ; v1(4941.73,2322.83) 4936.41,2317.51 4936.41,2254.53 R89.2@4960.63,2230.31 ; v1(4973.23,2385.83) 4973.23,2409.65 C140.2@4976.38,2412.8
  Bottom Layer w10: C142.1@4761.81,2283.46 4784.25,2305.91 v1(4784.25,2322.83)
A2: Q1.K19 Q2.P3 Q3.P3 R9.1 | length 4415.2
  Top Layer w4: Q1.K19@5366.93,2716.54 v1(5382.68,2732.28) ; v1(5976.38,2559.06) 5994.71,2559.06 cw(c6001.71,2559.06) 6008.71,2559.06 ccw(c6015.71,2559.06) 6022.71,2559.06 cw(c6029.71,2559.06) 6036.71,2559.06 ccw(c6043.71,2559.06) 6050.71,2559.06 cw(c6057.71,2559.06) 6064.71,2559.06 ccw(c6071.71,2559.06) 6078.71,2559.06 cw(c6085.71,2559.06) 6092.71,2559.06 ccw(c6099.71,2559.06) 6106.71,2559.06 cw(c6113.71,2559.06) 6120.71,2559.06 ccw(c6127.71,2559.06) 6134.71,2559.06 cw(c6141.71,2559.06) 6148.71,2559.06 ccw(c6155.71,2559.06) 6162.71,2559.06 cw(c6169.71,2559.06) 6176.71,2559.06 ccw(c6183.71,2559.06) 6190.71,2559.06 cw(c6197.71,2559.06) 6204.71,2559.06 ccw(c6211.71,2559.06) 6218.71,2559.06 cw(c6225.71,2559.06) 6232.71,2559.06 ccw(c6239.71,2559.06) 6246.71,2559.06 cw(c6253.71,2559.06) 6260.71,2559.06 ccw(c6267.71,2559.06) 6274.71,2559.06 cw(c6281.71,2559.06) 6288.71,2559.06 ccw(c6295.71,2559.06) 6302.71,2559.06 cw(c6309.71,2559.06) 6316.71,2559.06 ccw(c6323.71,2559.06) 6330.71,2559.06 6370.08,2559.06 6377.95,2551.18 6377.95,2488.19 6385.83,2480.32 6425.2,2480.32 6433.07,2488.19 6433.07,2496.06 cw(c6436.57,2496.06) 6436.57,2499.56 6448.98,2499.56 ccw(c6448.98,2503.56) 6452.98,2503.56 ccw(c6448.98,2503.56) 6448.98,2507.56 6417.16,2507.56 cw(c6417.16,2511.56) 6413.16,2511.56 cw(c6417.16,2511.56) 6417.16,2515.56 6448.98,2515.56 ccw(c6448.98,2519.56) 6452.98,2519.56 ccw(c6448.98,2519.56) 6448.98,2523.56 6437.07,2523.56 cw(c6437.07,2527.56) 6433.07,2527.56 6433.07,2535.43 6425.2,2543.31 v1(6401.57,2543.31) ; Q3.P3@6346.46,2118.11 v1(6362.2,2102.36) 6439.95,2102.36 6543.31,1999.01 R9.1@6543.31,1902.17 ; Q2.P3@6346.46,2803.15 v1(6362.2,2787.4)
  Bottom Layer w4: v1(5382.68,2732.28) 5383.71,2732.28 5406.45,2709.54 5422.93,2709.54 5429.92,2716.54 5446.55,2716.54 5453.54,2709.54 5469.29,2709.54 5476.03,2716.28 5486.17,2716.28 5492.91,2709.54 5511.81,2709.54 5518.55,2716.28 5527.56,2716.28 5534.3,2709.54 5558.17,2709.54 5622.05,2645.67 5622.05,2566.93 5629.92,2559.06 5645.67,2559.06 5653.42,2566.8 5686.76,2566.8 ccw(c5686.76,2573.8) 5693.76,2573.8 5693.76,2575.55 cw(c5700.76,2575.55) 5700.76,2582.55 cw(c5700.76,2575.55) 5707.76,2575.55 5707.76,2573.8 ccw(c5714.76,2573.8) 5714.76,2566.8 ccw(c5714.76,2573.8) 5721.76,2573.8 5721.76,2575.55 cw(c5728.76,2575.55) 5728.76,2582.55 cw(c5728.76,2575.55) 5735.76,2575.55 5735.76,2573.8 ccw(c5742.76,2573.8) 5742.76,2566.8 ccw(c5742.76,2573.8) 5749.76,2573.8 5749.76,2575.55 cw(c5756.76,2575.55) 5756.76,2582.55 cw(c5756.76,2575.55) 5763.76,2575.55 5763.76,2573.8 ccw(c5770.76,2573.8) 5770.76,2566.8 ccw(c5770.76,2573.8) 5777.76,2573.8 5777.76,2575.55 cw(c5784.76,2575.55) 5784.76,2582.55 cw(c5784.76,2575.55) 5791.76,2575.55 5791.76,2573.8 ccw(c5798.76,2573.8) 5798.76,2566.8 ccw(c5798.76,2573.8) 5805.76,2573.8 5805.76,2575.55 cw(c5812.76,2575.55) 5812.76,2582.55 cw(c5812.76,2575.55) 5819.76,2575.55 5819.76,2573.8 ccw(c5826.76,2573.8) 5826.76,2566.8 ccw(c5826.76,2573.8) 5833.76,2573.8 5833.76,2575.55 cw(c5840.76,2575.55) 5840.76,2582.55 cw(c5840.76,2575.55) 5847.76,2575.55 5847.76,2573.8 ccw(c5854.76,2573.8) 5854.76,2566.8 ccw(c5854.76,2573.8) 5861.76,2573.8 5861.76,2575.55 cw(c5868.76,2575.55) 5868.76,2582.55 cw(c5868.76,2575.55) 5875.76,2575.55 5875.76,2573.8 ccw(c5882.76,2573.8) 5882.76,2566.8 ccw(c5882.76,2573.8) 5889.76,2573.8 5889.76,2575.55 cw(c5896.76,2575.55) 5896.76,2582.55 cw(c5896.76,2575.55) 5903.76,2575.55 5903.76,2573.8 ccw(c5910.76,2573.8) 5910.76,2566.8 ccw(c5910.76,2573.8) 5917.76,2573.8 5917.76,2575.55 cw(c5924.76,2575.55) 5924.76,2582.55 cw(c5924.76,2575.55) 5931.76,2575.55 5931.76,2559.05 ccw(c5938.76,2559.05) 5938.76,2552.05 ccw(c5938.76,2559.05) 5945.76,2559.05 5945.76,2559.8 cw(c5952.76,2559.8) 5952.76,2566.8 5968.63,2566.8 v1(5976.38,2559.06) ; v1(6362.2,2102.36) 6362.2,2141.73 6370.08,2149.61 6377.95,2149.61 ccw(c6377.95,2153.61) 6381.95,2153.61 6381.95,2162.73 cw(c6385.95,2162.73) 6385.95,2166.73 cw(c6385.95,2162.73) 6389.95,2162.73 6389.95,2135.25 ccw(c6393.95,2135.25) 6393.95,2131.25 ccw(c6393.95,2135.25) 6397.95,2135.25 6397.95,2159.04 cw(c6401.95,2159.04) 6401.95,2163.04 cw(c6401.95,2159.04) 6405.95,2159.04 6405.95,2135.25 ccw(c6409.95,2135.25) 6409.95,2131.25 ccw(c6409.95,2135.25) 6413.95,2135.25 6413.95,2145.61 cw(c6417.95,2145.61) 6417.95,2149.61 6433.07,2149.61 6440.94,2141.73 6440.94,2118.11 6437.73,2114.9 ccw(c6440.56,2112.07) 6437.73,2109.24 6438.75,2108.23 cw(c6435.92,2105.4) 6438.75,2102.57 cw(c6435.92,2105.4) 6433.09,2102.57 6417.93,2117.73 ccw(c6415.11,2114.9) 6412.28,2117.73 ccw(c6415.11,2114.9) 6412.28,2112.07 6420.76,2103.58 cw(c6417.93,2100.76) 6420.76,2097.93 6409.45,2086.61 6401.57,2086.61 cw(c6401.57,2090.11) 6398.08,2090.11 6398.08,2102.61 ccw(c6394.08,2102.61) 6394.08,2106.61 ccw(c6394.08,2102.61) 6390.08,2102.61 6390.08,2090.61 cw(c6386.08,2090.61) 6386.08,2086.61 6346.46,2086.61 ccw(c6346.46,2078.74) 6338.58,2078.74 ccw(c6346.46,2078.74) 6346.46,2070.87 6354.33,2070.87 cw(c6354.33,2062.99) 6362.2,2062.99 6362.2,2062.87 cw(c6358.2,2062.87) 6358.2,2058.87 6339.72,2058.87 ccw(c6339.72,2054.87) 6335.72,2054.87 ccw(c6339.72,2054.87) 6339.72,2050.87 6358.2,2050.87 cw(c6358.2,2046.87) 6362.2,2046.87 cw(c6358.2,2046.87) 6358.2,2042.87 6339.72,2042.87 ccw(c6339.72,2038.87) 6335.72,2038.87 ccw(c6339.72,2038.87) 6339.72,2034.87 6358.2,2034.87 cw(c6358.2,2030.87) 6362.2,2030.87 6362.2,2015.75 6377.83,2000.13 6441.07,2000.13 6454.48,2013.53 cw(c6457.3,2010.7) 6460.13,2013.53 6460.63,2013.03 ccw(c6463.46,2015.86) 6466.29,2013.03 ccw(c6463.46,2015.86) 6466.29,2018.69 6465.79,2019.19 cw(c6468.62,2022.02) 6465.79,2024.84 cw(c6468.62,2022.02) 6471.45,2024.84 6471.94,2024.35 ccw(c6474.77,2027.17) 6477.6,2024.35 ccw(c6474.77,2027.17) 6477.6,2030 6477.1,2030.5 cw(c6479.93,2033.33) 6477.1,2036.16 cw(c6479.93,2033.33) 6482.76,2036.16 6483.26,2035.66 ccw(c6486.09,2038.49) 6488.92,2035.66 ccw(c6486.09,2038.49) 6488.92,2041.32 6488.42,2041.82 cw(c6491.25,2044.64) 6488.42,2047.47 cw(c6491.25,2044.64) 6494.07,2047.47 6494.57,2046.97 ccw(c6497.4,2049.8) 6500.23,2046.97 ccw(c6497.4,2049.8) 6500.23,2052.63 6499.73,2053.13 cw(c6502.56,2055.96) 6499.73,2058.79 cw(c6502.56,2055.96) 6505.39,2058.79 6505.89,2058.29 ccw(c6508.71,2061.12) 6511.54,2058.29 ccw(c6508.71,2061.12) 6511.54,2063.94 6511.04,2064.44 cw(c6513.87,2067.27) 6511.04,2070.1 cw(c6513.87,2067.27) 6516.7,2070.1 6517.2,2069.6 ccw(c6520.03,2072.43) 6522.86,2069.6 ccw(c6520.03,2072.43) 6522.86,2075.26 6522.36,2075.76 cw(c6525.19,2078.58) 6522.36,2081.41 cw(c6525.19,2078.58) 6528.01,2081.41 6528.51,2080.91 ccw(c6531.34,2083.74) 6534.17,2080.91 ccw(c6531.34,2083.74) 6534.17,2086.57 6533.67,2087.07 cw(c6536.5,2089.9) 6533.67,2092.73 6542.69,2101.74 6542.69,2149.61 6519.81,2172.48 6519.81,2543.43 6542.69,2566.31 6542.69,2769.41 6485.7,2826.4 6400.17,2826.4 6362.2,2788.43 v1(6362.2,2787.4) 6362.2,2779.53 6377.95,2763.78 6377.95,2722 6385.08,2714.87 6385.08,2702.45 6377.95,2695.32 6377.95,2686.8 cw(c6377.95,2679.8) 6377.95,2672.8 ccw(c6377.95,2665.8) 6377.95,2658.8 cw(c6377.95,2651.8) 6377.95,2644.8 ccw(c6377.95,2637.8) 6377.95,2630.8 cw(c6377.95,2623.8) 6377.95,2616.8 ccw(c6377.95,2609.8) 6377.95,2602.8 cw(c6377.95,2595.8) 6377.95,2588.8 ccw(c6377.95,2581.8) 6377.95,2574.8 6377.95,2559.06 6393.7,2543.31 v1(6401.57,2543.31)
A3: Q1.L19 Q2.N2 Q3.N2 R11.1 | length 4367.4
  Top Layer w4: Q1.L19@5366.93,2685.04 v1(5382.68,2700.79) ; v1(5976.38,2527.56) 6011.21,2527.56 cw(c6015.21,2527.56) 6019.21,2527.56 ccw(c6023.21,2527.56) 6027.21,2527.56 cw(c6031.21,2527.56) 6035.21,2527.56 ccw(c6039.21,2527.56) 6043.21,2527.56 cw(c6047.21,2527.56) 6051.21,2527.56 ccw(c6055.21,2527.56) 6059.21,2527.56 cw(c6063.21,2527.56) 6067.21,2527.56 ccw(c6071.21,2527.56) 6075.21,2527.56 cw(c6079.21,2527.56) 6083.21,2527.56 ccw(c6087.21,2527.56) 6091.21,2527.56 cw(c6095.21,2527.56) 6099.21,2527.56 ccw(c6103.21,2527.56) 6107.21,2527.56 cw(c6111.21,2527.56) 6115.21,2527.56 ccw(c6119.21,2527.56) 6123.21,2527.56 cw(c6127.21,2527.56) 6131.21,2527.56 ccw(c6135.21,2527.56) 6139.21,2527.56 cw(c6143.21,2527.56) 6147.21,2527.56 ccw(c6151.21,2527.56) 6155.21,2527.56 cw(c6159.21,2527.56) 6163.21,2527.56 ccw(c6167.21,2527.56) 6171.21,2527.56 cw(c6175.21,2527.56) 6179.21,2527.56 ccw(c6183.21,2527.56) 6187.21,2527.56 cw(c6191.21,2527.56) 6195.21,2527.56 ccw(c6199.21,2527.56) 6203.21,2527.56 cw(c6207.21,2527.56) 6211.21,2527.56 ccw(c6215.21,2527.56) 6219.21,2527.56 cw(c6223.21,2527.56) 6227.21,2527.56 ccw(c6231.21,2527.56) 6235.21,2527.56 cw(c6239.21,2527.56) 6243.21,2527.56 ccw(c6247.21,2527.56) 6251.21,2527.56 cw(c6255.21,2527.56) 6259.21,2527.56 ccw(c6263.21,2527.56) 6267.21,2527.56 cw(c6271.21,2527.56) 6275.21,2527.56 ccw(c6279.21,2527.56) 6283.21,2527.56 cw(c6287.21,2527.56) 6291.21,2527.56 6307.09,2527.56 6318.9,2515.75 6338.58,2496.06 6354.33,2496.06 6362.2,2488.19 6362.2,2473.45 ccw(c6366.2,2473.45) 6366.2,2469.45 6367.9,2469.45 cw(c6367.9,2465.45) 6371.9,2465.45 cw(c6367.9,2465.45) 6367.9,2461.45 6356.51,2461.45 ccw(c6356.51,2457.45) 6352.51,2457.45 ccw(c6356.51,2457.45) 6356.51,2453.45 6367.9,2453.45 cw(c6367.9,2449.45) 6371.9,2449.45 cw(c6367.9,2449.45) 6367.9,2445.45 6356.51,2445.45 ccw(c6356.51,2441.45) 6352.51,2441.45 ccw(c6356.51,2441.45) 6356.51,2437.45 6367.9,2437.45 cw(c6367.9,2433.45) 6371.9,2433.45 cw(c6367.9,2433.45) 6367.9,2429.45 6356.51,2429.45 ccw(c6356.51,2425.45) 6352.51,2425.45 ccw(c6356.51,2425.45) 6356.51,2421.45 6358.2,2421.45 cw(c6358.2,2417.45) 6362.2,2417.45 6362.2,2409.45 6370.08,2401.57 6377.57,2401.57 ccw(c6377.57,2405.57) 6381.57,2405.57 6381.57,2407.27 cw(c6385.57,2407.27) 6385.57,2411.27 cw(c6385.57,2407.27) 6389.57,2407.27 6389.57,2405.57 ccw(c6393.57,2405.57) 6393.57,2401.57 6401.57,2401.57 6409.45,2409.45 6409.45,2425.2 cw(c6412.94,2425.2) 6412.94,2428.69 6419.73,2428.69 ccw(c6419.73,2432.69) 6423.73,2432.69 ccw(c6419.73,2432.69) 6419.73,2436.69 6399.17,2436.69 cw(c6399.17,2440.69) 6395.17,2440.69 cw(c6399.17,2440.69) 6399.17,2444.69 6419.73,2444.69 ccw(c6419.73,2448.69) 6423.73,2448.69 ccw(c6419.73,2448.69) 6419.73,2452.69 6413.45,2452.69 cw(c6413.45,2456.69) 6409.45,2456.69 6409.45,2464.57 6401.7,2472.32 6382.51,2472.32 6369.95,2484.88 6369.95,2519.81 6362.2,2527.56 6330.71,2527.56 v1(6330.63,2527.48) ; R11.1@6275.59,1807.68 6299.12,1831.2 6299.12,1905.42 6299.21,1905.51 v1(6299.21,2070.87) Q3.N2@6314.96,2086.61 ; Q2.N2@6314.96,2771.65 v1(6330.71,2755.91)
  Bottom Layer w4: v1(5382.68,2700.79) 5387.89,2700.79 5395.39,2693.28 5551.81,2693.28 5606.05,2639.04 5606.05,2560.3 5623.29,2543.06 5684.76,2543.06 5692.51,2550.8 5724.82,2550.8 5732.57,2543.06 5773.81,2543.06 5781.19,2550.43 5793.61,2550.43 5808.49,2535.56 5819.28,2535.56 5826.77,2543.06 5834.9,2543.06 5842.39,2535.56 5850.39,2535.56 5857.89,2543.06 5866.14,2543.06 5873.64,2535.56 5881.89,2535.56 5889.39,2543.06 5905.26,2543.06 5920.76,2527.56 v1(5976.38,2527.56) ; v1(6299.21,2070.87) 6299.21,2015.75 6346.46,1968.5 6455.7,1968.5 6566.69,2079.49 6566.69,2185.83 ccw(c6562.69,2185.83) 6562.69,2189.83 6548.08,2189.83 cw(c6548.08,2193.83) 6544.08,2193.83 cw(c6548.08,2193.83) 6548.08,2197.83 6562.69,2197.83 ccw(c6562.69,2201.83) 6566.69,2201.83 ccw(c6562.69,2201.83) 6562.69,2205.83 6548.08,2205.83 cw(c6548.08,2209.83) 6544.08,2209.83 cw(c6548.08,2209.83) 6548.08,2213.83 6562.69,2213.83 ccw(c6562.69,2217.83) 6566.69,2217.83 ccw(c6562.69,2217.83) 6562.69,2221.83 6548.08,2221.83 cw(c6548.08,2225.83) 6544.08,2225.83 cw(c6548.08,2225.83) 6548.08,2229.83 6562.69,2229.83 ccw(c6562.69,2233.83) 6566.69,2233.83 ccw(c6562.69,2233.83) 6562.69,2237.83 6548.08,2237.83 cw(c6548.08,2241.83) 6544.08,2241.83 cw(c6548.08,2241.83) 6548.08,2245.83 6562.69,2245.83 ccw(c6562.69,2249.83) 6566.69,2249.83 ccw(c6562.69,2249.83) 6562.69,2253.83 6548.08,2253.83 cw(c6548.08,2257.83) 6544.08,2257.83 cw(c6548.08,2257.83) 6548.08,2261.83 6562.69,2261.83 ccw(c6562.69,2265.83) 6566.69,2265.83 ccw(c6562.69,2265.83) 6562.69,2269.83 6548.08,2269.83 cw(c6548.08,2273.83) 6544.08,2273.83 cw(c6548.08,2273.83) 6548.08,2277.83 6562.69,2277.83 ccw(c6562.69,2281.83) 6566.69,2281.83 ccw(c6562.69,2281.83) 6562.69,2285.83 6548.08,2285.83 cw(c6548.08,2289.83) 6544.08,2289.83 cw(c6548.08,2289.83) 6548.08,2293.83 6562.69,2293.83 ccw(c6562.69,2297.83) 6566.69,2297.83 ccw(c6562.69,2297.83) 6562.69,2301.83 6548.08,2301.83 cw(c6548.08,2305.83) 6544.08,2305.83 cw(c6548.08,2305.83) 6548.08,2309.83 6562.69,2309.83 ccw(c6562.69,2313.83) 6566.69,2313.83 ccw(c6562.69,2313.83) 6562.69,2317.83 6548.08,2317.83 cw(c6548.08,2321.83) 6544.08,2321.83 cw(c6548.08,2321.83) 6548.08,2325.83 6562.69,2325.83 ccw(c6562.69,2329.83) 6566.69,2329.83 ccw(c6562.69,2329.83) 6562.69,2333.83 6548.08,2333.83 cw(c6548.08,2337.83) 6544.08,2337.83 cw(c6548.08,2337.83) 6548.08,2341.83 6562.69,2341.83 ccw(c6562.69,2345.83) 6566.69,2345.83 ccw(c6562.69,2345.83) 6562.69,2349.83 6548.08,2349.83 cw(c6548.08,2353.83) 6544.08,2353.83 cw(c6548.08,2353.83) 6548.08,2357.83 6562.69,2357.83 ccw(c6562.69,2361.83) 6566.69,2361.83 ccw(c6562.69,2361.83) 6562.69,2365.83 6548.64,2365.83 cw(c6548.64,2369.83) 6544.64,2369.83 cw(c6548.64,2369.83) 6548.64,2373.83 6562.69,2373.83 ccw(c6562.69,2377.83) 6566.69,2377.83 6566.69,2779.35 6495.64,2850.4 6372.5,2850.4 6315.71,2793.61 6315.71,2774.35 6330.71,2759.35 v1(6330.71,2755.91) ; v1(6330.63,2527.48) 6330.63,2543.48 cw(c6330.63,2547.48) 6330.63,2551.48 ccw(c6330.63,2555.48) 6330.63,2559.48 cw(c6330.63,2563.48) 6330.63,2567.48 ccw(c6330.63,2571.48) 6330.63,2575.48 cw(c6330.63,2579.48) 6330.63,2583.48 ccw(c6330.63,2587.48) 6330.63,2591.48 cw(c6330.63,2595.48) 6330.63,2599.48 ccw(c6330.63,2603.48) 6330.63,2607.48 cw(c6330.63,2611.48) 6330.63,2615.48 ccw(c6330.63,2619.48) 6330.63,2623.48 cw(c6330.63,2627.48) 6330.63,2631.48 ccw(c6330.63,2635.48) 6330.63,2639.48 cw(c6330.63,2643.48) 6330.63,2647.48 ccw(c6330.63,2651.48) 6330.63,2655.48 cw(c6330.63,2659.48) 6330.63,2663.48 ccw(c6330.63,2667.48) 6330.63,2671.48 cw(c6330.63,2675.48) 6330.63,2679.48 ccw(c6330.63,2683.48) 6330.63,2687.48 cw(c6330.63,2691.48) 6330.63,2695.48 ccw(c6330.63,2699.48) 6330.63,2703.48 6330.63,2711.48 ccw(c6330.63,2715.48) 6330.63,2719.48 cw(c6330.63,2723.48) 6330.63,2727.48 ccw(c6330.63,2731.48) 6330.63,2735.48 cw(c6330.63,2739.48) 6330.63,2743.48 v1@6330.63,2755.83
A3V3: C93.2 C94.2 C112.2 Q10.1 Q10.12 Q17.5 | length 777.9
  Top Layer w6: Q10.12@5521.65,4003.94 v1(5521.65,4037.4) ; Q10.1@5738.19,4003.94 v1(5738.19,4037.4)
  Top Layer w10: Q17.5@5374.02,4336.61 5375.98,4338.58 C112.2@5438.98,4338.58 5438.98,4120.08 v1(5521.65,4037.4)
  Bottom Layer w6: C94.2@5519.69,4074.21 C94.2@5521.65,4072.24
  Bottom Layer w10: C94.2@5521.65,4072.24 v1(5521.65,4037.4) 5543.31,4015.75 5716.54,4015.75 v1(5738.19,4037.4) 5738.19,4072.24 C93.2@5740.16,4074.21
A4: Q1.K17 Q2.P8 Q3.P8 R13.1 | length 4142.4
  Top Layer w4: Q1.K17@5303.94,2716.54 v1(5319.69,2732.28) ; v1(5755.91,2692.91) 5755.91,2708.79 cw(c5759.91,2708.79) 5759.91,2712.79 5775.4,2712.79 ccw(c5775.4,2716.79) 5779.4,2716.79 ccw(c5775.4,2716.79) 5775.4,2720.79 5759.91,2720.79 cw(c5759.91,2724.79) 5755.91,2724.79 cw(c5759.91,2724.79) 5759.91,2728.79 5775.4,2728.79 ccw(c5775.4,2732.79) 5779.4,2732.79 ccw(c5775.4,2732.79) 5775.4,2736.79 5759.91,2736.79 cw(c5759.91,2740.79) 5755.91,2740.79 cw(c5759.91,2740.79) 5759.91,2744.79 5775.4,2744.79 ccw(c5775.4,2748.79) 5779.4,2748.79 ccw(c5775.4,2748.79) 5775.4,2752.79 5759.91,2752.79 cw(c5759.91,2756.79) 5755.91,2756.79 cw(c5759.91,2756.79) 5759.91,2760.79 5775.4,2760.79 ccw(c5775.4,2764.79) 5779.4,2764.79 ccw(c5775.4,2764.79) 5775.4,2768.79 5759.91,2768.79 cw(c5759.91,2772.79) 5755.91,2772.79 5755.91,2888.13 ccw(c5755.91,2892.13) 5755.91,2896.13 cw(c5755.91,2900.13) 5755.91,2904.13 ccw(c5755.91,2908.13) 5755.91,2912.13 cw(c5755.91,2916.13) 5755.91,2920.13 ccw(c5755.91,2924.13) 5755.91,2928.13 cw(c5755.91,2932.13) 5755.91,2936.13 ccw(c5755.91,2940.13) 5755.91,2944.13 cw(c5755.91,2948.13) 5755.91,2952.13 ccw(c5755.91,2956.13) 5755.91,2960.13 cw(c5755.91,2964.13) 5755.91,2968.13 ccw(c5755.91,2972.13) 5755.91,2976.13 cw(c5755.91,2980.13) 5755.91,2984.13 ccw(c5755.91,2988.13) 5755.91,2992.13 5755.91,3005.43 5884.33,3133.86 5897.76,3133.86 ccw(c5901.76,3133.86) 5905.76,3133.86 cw(c5909.76,3133.86) 5913.76,3133.86 ccw(c5917.76,3133.86) 5921.76,3133.86 cw(c5925.76,3133.86) 5929.76,3133.86 ccw(c5933.76,3133.86) 5937.76,3133.86 cw(c5941.76,3133.86) 5945.76,3133.86 ccw(c5949.76,3133.86) 5953.76,3133.86 cw(c5957.76,3133.86) 5961.76,3133.86 ccw(c5965.76,3133.86) 5969.76,3133.86 cw(c5973.76,3133.86) 5977.76,3133.86 ccw(c5981.76,3133.86) 5985.76,3133.86 cw(c5989.76,3133.86) 5993.76,3133.86 ccw(c5997.76,3133.86) 6001.76,3133.86 cw(c6005.76,3133.86) 6009.76,3133.86 ccw(c6013.76,3133.86) 6017.76,3133.86 cw(c6021.76,3133.86) 6025.76,3133.86 ccw(c6029.76,3133.86) 6033.76,3133.86 cw(c6037.76,3133.86) 6041.76,3133.86 ccw(c6045.76,3133.86) 6049.76,3133.86 cw(c6053.76,3133.86) 6057.76,3133.86 ccw(c6061.76,3133.86) 6065.76,3133.86 cw(c6069.76,3133.86) 6073.76,3133.86 ccw(c6077.76,3133.86) 6081.76,3133.86 cw(c6085.76,3133.86) 6089.76,3133.86 ccw(c6093.76,3133.86) 6097.76,3133.86 cw(c6101.76,3133.86) 6105.76,3133.86 ccw(c6109.76,3133.86) 6113.76,3133.86 cw(c6117.76,3133.86) 6121.76,3133.86 ccw(c6125.76,3133.86) 6129.76,3133.86 cw(c6133.76,3133.86) 6137.76,3133.86 ccw(c6141.76,3133.86) 6145.76,3133.86 cw(c6149.76,3133.86) 6153.76,3133.86 ccw(c6157.76,3133.86) 6161.76,3133.86 cw(c6165.76,3133.86) 6169.76,3133.86 ccw(c6173.76,3133.86) 6177.76,3133.86 cw(c6181.76,3133.86) 6185.76,3133.86 ccw(c6189.76,3133.86) 6193.76,3133.86 cw(c6197.76,3133.86) 6201.76,3133.86 ccw(c6205.76,3133.86) 6209.76,3133.86 cw(c6213.76,3133.86) 6217.76,3133.86 ccw(c6221.76,3133.86) 6225.76,3133.86 cw(c6229.76,3133.86) 6233.76,3133.86 ccw(c6237.76,3133.86) 6241.76,3133.86 cw(c6245.76,3133.86) 6249.76,3133.86 ccw(c6253.76,3133.86) 6257.76,3133.86 cw(c6261.76,3133.86) 6265.76,3133.86 ccw(c6269.76,3133.86) 6273.76,3133.86 cw(c6277.76,3133.86) 6281.76,3133.86 ccw(c6285.76,3133.86) 6289.76,3133.86 cw(c6293.76,3133.86) 6297.76,3133.86 ccw(c6301.76,3133.86) 6305.76,3133.86 cw(c6309.76,3133.86) 6313.76,3133.86 ccw(c6317.76,3133.86) 6321.76,3133.86 cw(c6325.76,3133.86) 6329.76,3133.86 6337.76,3133.86 cw(c6341.76,3133.86) 6345.76,3133.86 v1(6362.2,3133.86) ; Q3.P8@6346.46,2275.59 6362.2,2259.84 6362.2,2204.72 6370.08,2196.85 6655.57,2196.85 ccw(c6655.57,2200.85) 6659.57,2200.85 6659.57,2211.97 cw(c6663.57,2211.97) 6663.57,2215.97 cw(c6663.57,2211.97) 6667.57,2211.97 6667.57,2200.85 ccw(c6671.57,2200.85) 6671.57,2196.85 6679.57,2196.85 6686.7,2203.98 6698.78,2203.98 ccw(c6698.78,2207.98) 6702.78,2207.98 6702.78,2211.82 cw(c6706.78,2211.82) 6706.78,2215.82 cw(c6706.78,2211.82) 6710.78,2211.82 6710.78,2188.86 ccw(c6714.78,2188.86) 6714.78,2184.86 ccw(c6714.78,2188.86) 6718.78,2188.86 6718.78,2209.47 cw(c6722.78,2209.47) 6722.78,2213.47 cw(c6722.78,2209.47) 6726.78,2209.47 6726.78,2188.86 ccw(c6730.78,2188.86) 6730.78,2184.86 ccw(c6730.78,2188.86) 6734.78,2188.86 6734.78,2209.47 cw(c6738.78,2209.47) 6738.78,2213.47 cw(c6738.78,2209.47) 6742.78,2209.47 6742.78,2188.86 ccw(c6746.78,2188.86) 6746.78,2184.86 ccw(c6746.78,2188.86) 6750.78,2188.86 6750.78,2209.47 cw(c6754.78,2209.47) 6754.78,2213.47 cw(c6754.78,2209.47) 6758.78,2209.47 6758.78,2188.86 ccw(c6762.78,2188.86) 6762.78,2184.86 ccw(c6762.78,2188.86) 6766.78,2188.86 6766.78,2199.98 cw(c6770.78,2199.98) 6770.78,2203.98 6778.78,2203.98 6787.4,2212.6 6787.4,2228.35 6774.56,2241.18 6756.79,2241.18 ccw(c6756.79,2237.18) 6752.79,2237.18 6752.79,2226.07 cw(c6748.79,2226.07) 6748.79,2222.07 cw(c6748.79,2226.07) 6744.79,2226.07 6744.79,2237.18 ccw(c6740.79,2237.18) 6740.79,2241.18 ccw(c6740.79,2237.18) 6736.79,2237.18 6736.79,2226.07 cw(c6732.79,2226.07) 6732.79,2222.07 cw(c6732.79,2226.07) 6728.79,2226.07 6728.79,2237.18 ccw(c6724.79,2237.18) 6724.79,2241.18 ccw(c6724.79,2237.18) 6720.79,2237.18 6720.79,2226.07 cw(c6716.79,2226.07) 6716.79,2222.07 cw(c6716.79,2226.07) 6712.79,2226.07 6712.79,2237.18 ccw(c6708.79,2237.18) 6708.79,2241.18 6687.95,2241.18 v1(6685.04,2244.09) ; Q2.P8@6346.46,2960.63 v1(6362.2,2976.38)
  Bottom Layer w4: v1(5319.69,2732.28) 5335.43,2748.03 5428.89,2748.03 5436.89,2756.03 5507.12,2756.03 5514.75,2748.4 5559.68,2748.4 5615.17,2692.91 5669.29,2692.91 5677.04,2685.17 5692.91,2685.17 ccw(c5692.91,2689.17) 5696.91,2689.17 5696.91,2690.51 cw(c5700.91,2690.51) 5700.91,2694.51 cw(c5700.91,2690.51) 5704.91,2690.51 5704.91,2689.17 ccw(c5708.91,2689.17) 5708.91,2685.17 5748.16,2685.17 v1(5755.91,2692.91) ; v1(6362.2,3133.86) 6362.2,3118.11 ccw(c6366.2,3118.11) 6366.2,3114.11 cw(c6366.2,3110.11) 6370.2,3110.11 cw(c6366.2,3110.11) 6366.2,3106.11 6358.2,3106.11 ccw(c6358.2,3102.11) 6354.2,3102.11 ccw(c6358.2,3102.11) 6358.2,3098.11 6366.2,3098.11 cw(c6366.2,3094.11) 6370.2,3094.11 cw(c6366.2,3094.11) 6366.2,3090.11 6358.2,3090.11 ccw(c6358.2,3086.11) 6354.2,3086.11 ccw(c6358.2,3086.11) 6358.2,3082.11 cw(c6358.2,3078.11) 6362.2,3078.11 v1(6362.2,2976.38) 6362.2,2969.9 6393.7,2938.4 6532.09,2938.4 6654.69,2815.8 6654.69,2274.45 v1(6685.04,2244.09) 6716.54,2212.6 R13.1@6719.88,2212.6